# Altium PCB ProstheticController.PcbDoc
Units mil, origin at the board's own origin, x right, y up, seen from the top; angles counter-clockwise.
Board outline 3000 x 2000 mil, 2 copper layers (Top Layer, Bottom Layer); 32 components, 26 nets, 115 pads, 27 vias.
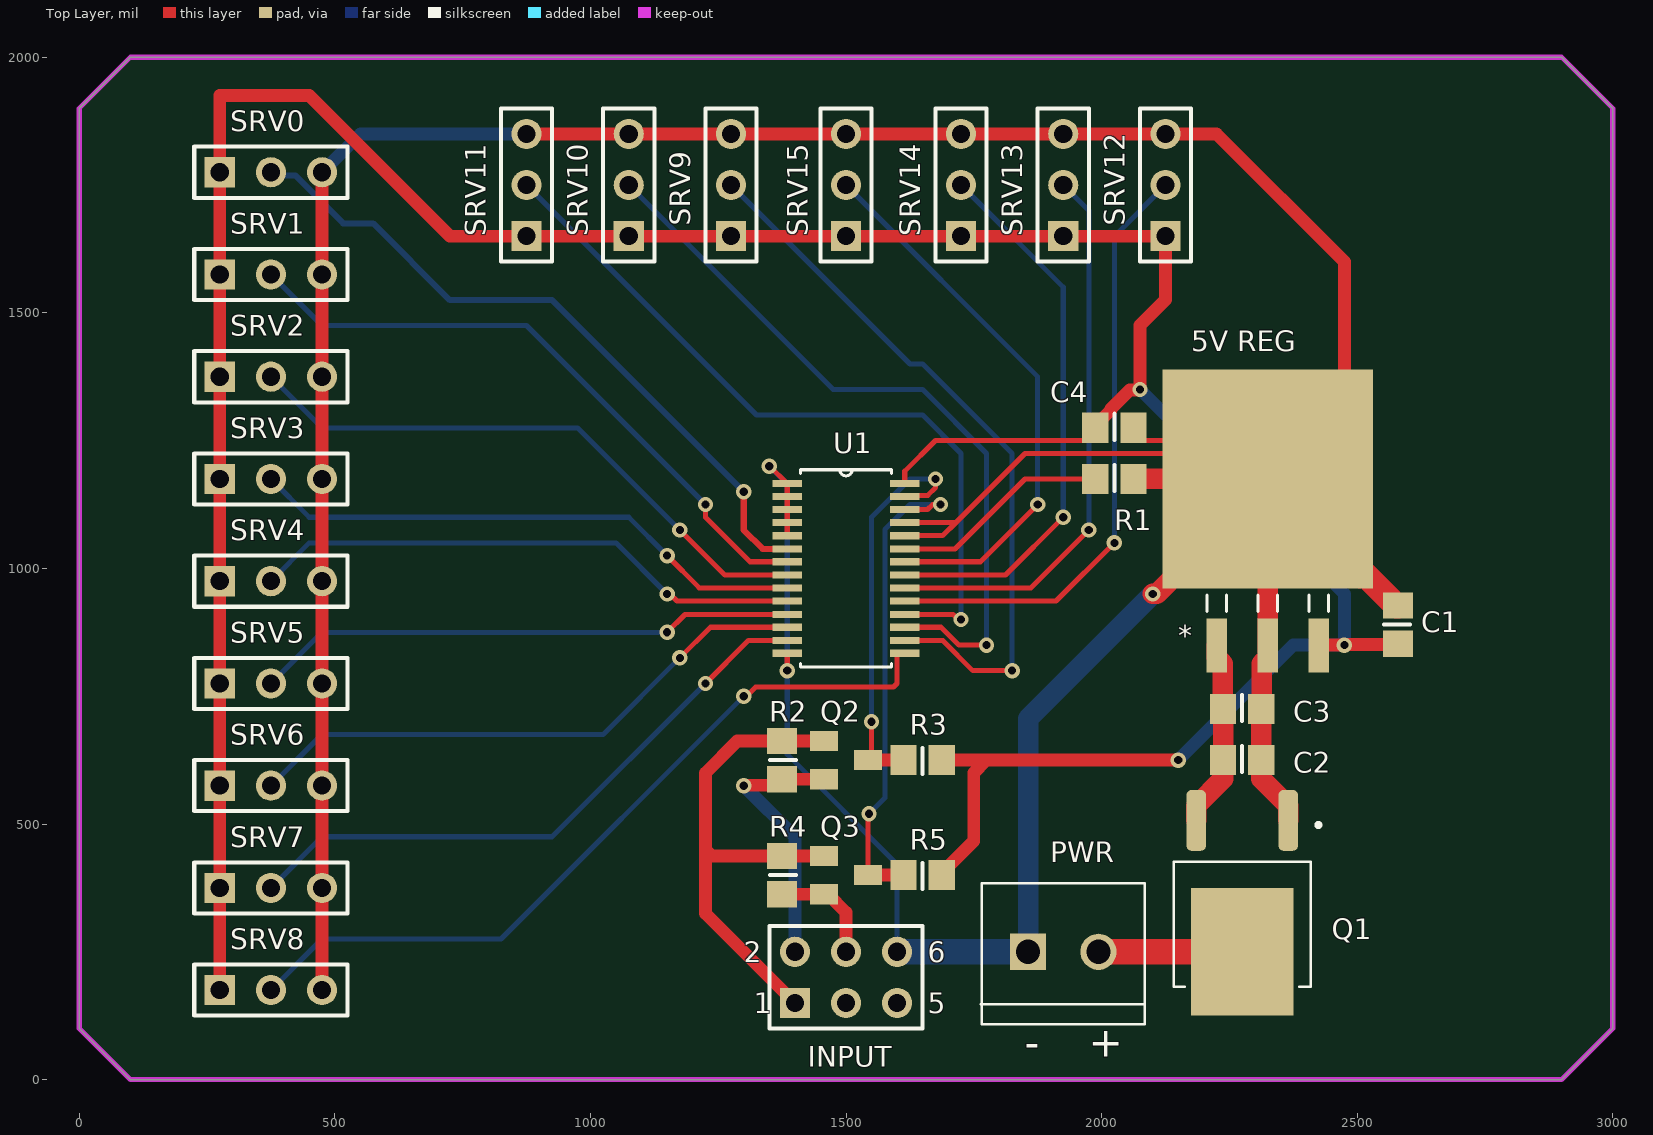
[diagram p0: Top Layer view]
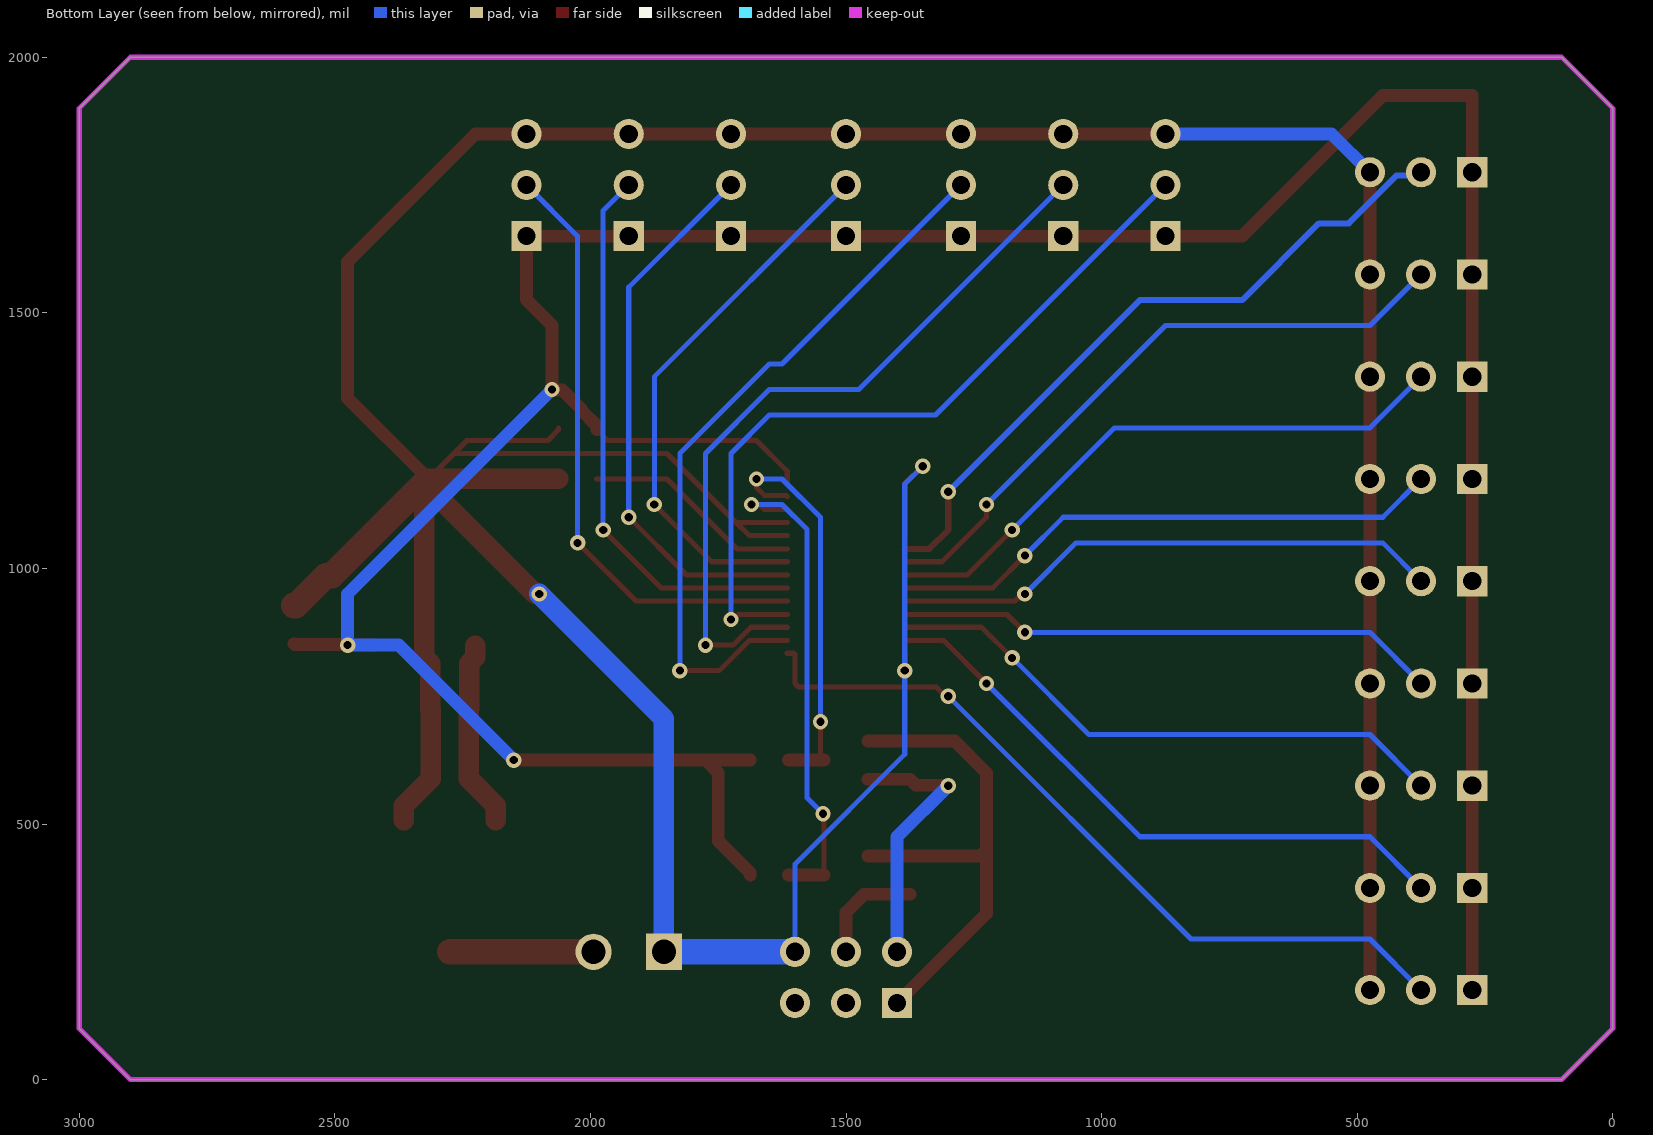
[diagram p1: Bottom Layer view, seen from below]

## Layer stack, top to bottom
Top Solder: solder mask 0.4, Solder Resist, Dk 3.5
Top Layer: signal copper 1.4
Dielectric 1: dielectric 12.6, FR-4, Dk 4.8
Bottom Layer: signal copper 1.4
Bottom Solder: solder mask 0.4, Solder Resist, Dk 3.5

## Board outline
100,0 0,100 0,1900 100,2000 2900,2000 3000,1900 3000,100 2900,0

## Design rules (kind name [scope] priority, off if disabled: settings)
Clearance "Clearance~Sunstone Circuits" [All] p1: gap=6 ignorepadtopadclearanceinfootprint=FALSE except(0: Arc-Hole Track-Hole SMDPad-Hole THPad-Hole Via-Hole Fill-Hole Poly-Hole Region-Hole Text-Hole) // Sunstone Circuits Minimum Clearance Rule (Double Sided)
ComponentClearance [All] p1: gap=0 collisioncheckmode=3 verticalgap=0 showdistances=FALSE
HoleSize "HoleSize~Sunstone Circuits" [All] p1: absolutevalues=TRUE maxlimit=251 minlimit=16 maxpercent=80.000 minpercent=20.000 // SSC Hole Size Rule For Single Sided & Double Sided Designs.
HoleSize Testpoint [All] p2: absolutevalues=TRUE maxlimit=100 minlimit=1 maxpercent=80.000 minpercent=20.000
HoleSize TestPointUsage [All] p3: absolutevalues=TRUE maxlimit=100 minlimit=1 maxpercent=80.000 minpercent=20.000
MinimumAnnularRing "MinimumAnnularRing~Sunstone Circuits" [All] p1: minimumring=7 // Sunstone Circuits Minimum Annular Ring (Double Sided)
MinimumSolderMaskSliver [All] p1: minsoldermaskwidth=2
PlaneClearance "PlaneClearance~Sunstone Circuits" [All] p1: clearance=12 // Sunstone Circuits Power Plane Clearance Rule (Double Sided)
PlaneConnect "PlaneConnect~Sunstone Circuits" [All] p1: planeconnectstyle=Relief reliefexpansion=10 reliefentries=4 reliefconductorwidth=8 reliefairgap=10 // Sunstone Circuits Power Plane Connect Rule (Double Sided)
PolygonConnect "PolygonConnect~Sunstone Circuits" [All] p1: connectstyle=Relief reliefconductorwidth=8 reliefentries=4 polygonreliefangle="90 Angle" airgapwidth=10 // Sunstone Circuits Polygon Connect Style (Double Sided)
RoutingVias "RoutingVias~Sunstone Circuits" [All] p1: holewidth=16 width=30 viastyle="Through Hole" minholewidth=16 minwidth=30 maxholewidth=20 maxwidth=40 // Sunstone Circuits Routing Vias Rule (Double Sided)
ShortCircuit "ShortCircuit~Sunstone Circuits" [All] p1: allowed=FALSE // Sunstone Circuits Short Circuit Rule~Do Not Allow (Double Sided)
SilkToSilkClearance [All] p1: silktosilkclearance=1
SilkToSolderMaskClearance [IsPad] p1: minsilkscreentomaskgap=3 clearancetoexposedcopper=TRUE
SolderMaskExpansion "SolderMaskExpansion~Sunstone Circuits" [All] p1: expansion=3 // Sunstone Circuits Solder Mask Expansion Rule (Double Sided)
ViasUnderSMD "ViasUnderSMD~Sunstone Circuits" [All] p1: allowed=FALSE // Sunstone Circuits Vias Under SMD~Do Not Allow (Double Sided)
Width "Width~Sunstone Circuits" [All] p1: maxlimit=100 minlimit=6 preferedwidth=10 // Sunstone Circuits Minimum Width Rule (Double Sided)
22 further rules are at their usual default settings.

## Components (designator, comment, footprint, x,y, rotation, side; value= is the part's Value field where it differs from the comment)
"5V REG" "LM340SX-5.0/NOPB" TS3B_TEX 2325,1175 r0 top
C1 "10uF" 0805-CAP 2580,890 r270 top
C2 "10uF" 0805-CAP 2275,625 r180 top
C3 "220nF" 0805-CAP 2275,725 r180 top
C4 "100nF" 0805-CAP 2025,1275 r180 top
INPUT "Header 3X2" HDR2X3 1400,150 r0 top
PWR "PWR" OST_OSTTE020161 1925,250 r0 top
Q1 "AOD417" DPAK228P994X240_3N 2275,346.06 r180 top
Q2 "BSS138" *BSS138_BSS138(Primary) 1500,625 r270 top
Q3 "BSS138" *BSS138_BSS138(Primary) 1500,400 r270 top
R1 "10k" 0805-RES 2025,1175 r180 top
R2 "2.4k" 0805-RES 1375,625 r90 top
R3 "2.4k" 0805-RES 1650,625 r0 top
R4 "2.4k" 0805-RES 1375,400 r90 top
R5 "2.4k" 0805-RES 1650,400 r0 top
SRV0 "Header 3" HDR1X3 275,1775 r0 top
SRV1 "Header 3" HDR1X3 275,1575 r0 top
SRV2 "Header 3" HDR1X3 275,1375 r0 top
SRV3 "Header 3" HDR1X3 275,1175 r0 top
SRV4 "Header 3" HDR1X3 275,975 r0 top
SRV5 "Header 3" HDR1X3 275,775 r0 top
SRV6 "Header 3" HDR1X3 275,575 r0 top
SRV7 "Header 3" HDR1X3 275,375 r0 top
SRV8 "Header 3" HDR1X3 275,175 r0 top
SRV9 "Header 3" HDR1X3 1275,1650 r90 top
SRV10 "Header 3" HDR1X3 1075,1650 r90 top
SRV11 "Header 3" HDR1X3 875,1650 r90 top
SRV12 "Header 3" HDR1X3 2125,1650 r90 top
SRV13 "Header 3" HDR1X3 1925,1650 r90 top
SRV14 "Header 3" HDR1X3 1725,1650 r90 top
SRV15 "Header 3" HDR1X3 1500,1650 r90 top
U1 "PCA9685PW,118" SOP65P640X110-28N 1500,1000 r0 top

## Footprints (in the part's own frame and the unit in brackets; to place one, negate y for a bottom-side part, rotate by r counter-clockwise, add the part's x,y. Pads: shape width x height; smd on the part's side, far side on the other; paste and mask are expansions set on the pad)
0805-CAP [mm]
  rect 1.3x1.5 smd: 1(-0.95,0) 2(0.95,0)
  silkscreen extent 0,-0.7 0,0.6, body extent -1,-0.68 1,0.57, height 0.78
0805-RES [mm]
  rect 1.3x1.5 smd: 1(-0.95,0) 2(0.95,0)
  silkscreen extent 0,-0.7 0,0.6, body extent -1,-0.68 1,0.57, height 0.78
*BSS138_BSS138(Primary) [mm]
  rect 1x1.4 smd: D(0,1.1) G(-0.95,-1.1) S(0.95,-1.1)
DPAK228P994X240_3N [mm]
  rrect50% 0.97x3.02 smd: 1(-2.286,-4.09) 3(2.286,-4.09)
  rect 5.09x6.32 smd paste-4: 4(0,2.44)
  silkscreen extent -3.89,-3.96 3.4,4.18
HDR1X3 [mm] "Connector; Header; 3 Position"
  rect 1.5x1.5 hole 0.9: 1(0,0)
  round 1.5 hole 0.9: 2(2.54,0) 3(5.08,0)
  silkscreen extent -1.27,-1.27 6.35,1.27
HDR2X3 [mm] "Connector; Header; 3x2 Position"
  rect 1.5x1.5 hole 0.9: 1(0,0)
  round 1.5 hole 0.9: 2(0,2.54) 3(2.54,0) 4(2.54,2.54) 5(5.08,0) 6(5.08,2.54)
  silkscreen extent -1.27,-1.27 6.35,3.81
OST_OSTTE020161 [mm]
  rect 1.8x1.8 hole 1.2: 1(-1.75,0)
  round 1.8 hole 1.2: 2(1.75,0)
  silkscreen extent -4.1,-3.6 4.05,3.4
SOP65P640X110-28N [mil]
  rect 58x14 smd: 1(-115,166) 2(-115,141) 3(-115,115) 4(-115,90) 5(-115,64) 6(-115,38) 7(-115,13) 8(-115,-13) 9(-115,-38) 10(-115,-64) 11(-115,-90) 12(-115,-115) 13(-115,-141) 14(-115,-166) 15(115,-166) 16(115,-141) 17(115,-115) 18(115,-90) 19(115,-64) 20(115,-38) 21(115,-13) 22(115,13) 23(115,38) 24(115,64) 25(115,90) 26(115,115) 27(115,141) 28(115,166)
  silkscreen extent -89,-193 89,193
TS3B_TEX [mil]
  rect 40x106 smd: 1(-100,-326) 2(0,-326) 3(100,-326)
  rect 412x428 smd: 4(0,0)
  Mechanical 16 keep-out region: -4100,-875
  silkscreen extent -119,-259 119,-227

## Part data
C1 C2 C3 C4: library part Cap, "Capacitor"
INPUT: "Header, 3-Pin, Dual row", LatestRevisionDate=17-Jul-2002, LatestRevisionNote="Re-released for DXP Platform.", Publisher="Altium Limited"
PWR: library part OSTTE020161, "Fio de 2 posições para embarcar na horizontal do bloco de terminais com furo passante da placa 0,138 _3,50 mm_", Package=None, Availability=Unavailable, MF="On Shore", MP=OSTTE020161, Price=None, SnapEDA_Link=https://www.snapeda.com/parts/OSTTE020161/On%20Shore%20Technology%20Inc./view-part/249314/?ref=snap
Q1: "P-Channel 30V 25A _Ta_ 2.5W _Ta_, 50W _Tc_ Surface Mount TO-252, _D-Pak_", Package="TO-252 Alpha &amp; Omega Semiconductor", Availability=Unavailable, MF="Alpha &", MP=AOD417, Price=None, SnapEDA_Link=https://www.snapeda.com/parts/AOD417/Alpha%20%26%20Omega%20Semiconductor%20Inc./view-part/454934/?ref=snap
Q2 Q3: "N-Channel 50V 220mA _Ta_ 360mW _Ta_ Surface Mount Die", Package="SOT-23 Fairchild Semiconductor", Availability=Unavailable, MF="MICROSS/On Semiconductor", MP=BSS138, Price=None, SnapEDA_Link=https://www.snapeda.com/parts/BSS138/MICROSS/On%20Semiconductor/view-part/215/?ref=snap
R1 R2 R3 R4 R5: library part ResBasic, "Resistor"
SRV0 SRV1 SRV2 SRV3 SRV4 SRV5 SRV6 SRV7 SRV8 SRV9 SRV10 SRV11 SRV12 SRV13 SRV14 SRV15: "Header, 3-Pin", LatestRevisionDate=17-Jul-2002, LatestRevisionNote="Re-released for DXP Platform.", Publisher="Altium Limited"
U1: "LED Driver IC 16 Output Linear PWM Dimming 25mA 28-TSSOP", Package="TSSOP-28 NXP Semiconductors", Digi-Key_Part_Number=568-11925-1-ND, Digi-Key_Purchase_URL=https://www.digikey.in/product-detail/en/nxp-usa-inc/PCA9685PW,118/568-11925-1-ND/5221902?utm_source=snapeda&utm_medium=aggregator&utm_campaign=symbol, MF="NXP USA", MP=PCA9685PW,118, SnapEDA_Link=https://www.snapeda.com/parts/PCA9685PW%2C118/NXP%20USA%20Inc./view-part/1041520/?ref=snap
"5V REG": Built_By=EMA_UL_Team, C="Copyright (C) 2015 Accelerated Designs. All rights reserved", Manufacturer_Part_Number=LM340SX-5.0/NOPB, SourceLibrary=National_2014-06-20, Vendor="Texas Instruments"

## Via types
v1: diameter 30, hole 16, Top Layer to Bottom Layer, 27 vias

## Nets (pads, with @x,y where several pads share a name; then routed paths per layer and width w, separated by ;. In a path a pad name is that pad's centre, name@x,y a point inside that pad or via, vN(x,y) a via of type N, cw(c..) or ccw(c..) an arc to the next point about the centre after c; other vN are vias at no path point)
5V: "5V REG.3" C1.2 C4.2 R3.2 R5.2 SRV0.1 SRV1.1 SRV2.1 SRV3.1 SRV4.1 SRV5.1 SRV6.1 SRV7.1 SRV8.1 SRV9.1 SRV10.1 SRV11.1 SRV12.1 SRV13.1 SRV14.1 SRV15.1 U1.28 | length 6555.3
  Top Layer w10: U1.28 1615,1190 1675,1250 1962.6,1250 1963.07,1250.47 1967.01,1250.47 C4.2@1987.6,1271.06
  Top Layer w25: SRV8.1 SRV7.1 SRV6.1 SRV5.1 SRV4.1 SRV3.1 SRV2.1 SRV1.1 SRV0.1 275,1925 450,1925 725,1650 SRV11.1 SRV10.1 SRV9.1 SRV15.1 SRV14.1 SRV13.1 SRV12.1 2125,1525.68 2075,1475.68 v1(2075,1350) 2074.04,1349.04 2055.16,1349.04 2018.31,1312.19 2018.31,1309.65 1987.6,1278.94 C4.2 C4.2@1987.6,1271.06 ; R5.2 1687.4,403.94 1750,466.54 1750,600 1775,625 ; R3.2 1775,625 ; v1(2150,625) 1775,625 ; 2425,849 2426,850 v1(2475,850) 2475.96,850.96 2578.36,850.96 C1.2
  Bottom Layer w25: v1(2075,1350) 2475,950 v1(2475,850) 2375,850 v1(2150,625)
GND: "5V REG.2" "5V REG.4" C1.1 C2.1 C3.1 C4.1 INPUT.6 PWR.1 Q1.1 R1.1 SRV0.3 SRV1.3 SRV2.3 SRV3.3 SRV4.3 SRV5.3 SRV6.3 SRV7.3 SRV8.3 SRV9.3 SRV10.3 SRV11.3 SRV12.3 SRV13.3 SRV14.3 SRV15.3 U1.1 U1.2 U1.3 U1.4 U1.5 U1.14 U1.24 U1.25 | length 9259.8
  Top Layer w10: v1(1350,1200) 1351,1200 U1.1 U1.2 U1.3 U1.4 U1.5 ; v1(1385,800) U1.14 ; U1.24 1689,1064 1715,1090 ; U1.25 1715,1090 ; C4.1 2062.4,1271.06 2082.99,1250.47 2241.53,1250.47 2267,1225 ; 2317,1175 2267,1225 ; 1715,1090 1850,1225 2267,1225
  Top Layer w25: SRV8.3 SRV7.3 SRV6.3 SRV5.3 SRV4.3 SRV3.3 SRV2.3 SRV1.3 SRV0.3 ; SRV11.3 SRV10.3 SRV9.3 SRV15.3 SRV14.3 SRV13.3 SRV12.3 2225,1850 2475,1600 2475,1333 2317,1175
  Top Layer w40: R1.1 2317,1175 2325,1167 ; v1(2100,950) 2108,950 2325,1167 ; Q1.1 2365,535.63 2312.4,588.23 C2.1 C3.1 2312.99,725.59 2312.99,813.99 2325,826 2325,849 2325,1167
  Top Layer w50: 2325,1167 2506,986 2517.46,986 2576.06,927.4 C1.1
  Bottom Layer w10: v1(1350,1200) 1385,1165 v1(1385,800) 1385,636.43 1600,421.43 INPUT.6
  Bottom Layer w25: SRV0.3 550,1850 SRV11.3
  Bottom Layer w40: PWR.1 1856.1,706.1 v1(2100,950)
  Bottom Layer w50: INPUT.6 PWR.1
NetPWR_2: PWR.2 Q1.4 | length 281.1
  Top Layer w50: PWR.2 Q1.4
NetR1_2: R1.2 U1.23 | length 429.3
  Top Layer w10: U1.23 1713,1038 1850,1175 R1.2
PWM0: SRV0.2 U1.6 | length 1359.2
  Top Layer w12: v1(1300,1150) 1300,1075 1337,1038 U1.6
  Bottom Layer w12: SRV0.2 381.26,1768.74 422.53,1768.74 516.27,1675 575,1675 725,1525 925,1525 v1(1300,1150)
PWM1: SRV1.2 U1.7 | length 1257.4
  Top Layer w10: v1(1225,1125) 1225,1100 1312,1013 U1.7
  Bottom Layer w10: SRV1.2 475,1475 875,1475 v1(1225,1125)
PWM2: SRV2.2 U1.8 | length 1170.7
  Top Layer w10: v1(1175,1075) 1263,987 U1.8
  Bottom Layer w10: SRV2.2 475,1275 975,1275 v1(1175,1075)
PWM3: SRV3.2 U1.9 | length 1098.2
  Top Layer w10: v1(1150,1025) 1213,962 U1.9
  Bottom Layer w10: SRV3.2 450,1100 1075,1100 v1(1150,1025)
PWM4: SRV4.2 U1.10 | length 1088.3
  Top Layer w10: v1(1150,950) 1155.41,950 1169.41,936 U1.10
  Bottom Layer w10: SRV4.2 450,1050 1050,1050 v1(1150,950)
PWM5: SRV5.2 U1.11 | length 1065.9
  Top Layer w10: v1(1150,875) 1185,910 U1.11
  Bottom Layer w10: SRV5.2 475,875 v1(1150,875)
PWM6: SRV6.2 U1.12 | length 1138.4
  Top Layer w10: v1(1175,825) 1235,885 U1.12
  Bottom Layer w10: SRV6.2 475,675 1025,675 v1(1175,825)
PWM7: SRV7.2 U1.13 | length 1210.5
  Top Layer w10: v1(1225,775) 1309,859 U1.13
  Bottom Layer w10: SRV7.2 475,475 925,475 v1(1225,775)
PWM8: SRV8.2 U1.15 | length 1546.4
  Top Layer w10: v1(1300,750) 1305.41,750 1323.38,767.97 1592.97,767.97 1600,775 1600,832 1602,834 U1.15
  Bottom Layer w10: SRV8.2 475,275 825,275 v1(1300,750)
PWM9: SRV9.2 U1.16 | length 1426.9
  Top Layer w10: U1.16 1689.17,859 1748.17,800 v1(1825,800)
  Bottom Layer w10: SRV9.2 1625,1400 1650,1400 1825,1225 v1(1825,800)
PWM10: SRV10.2 U1.17 | length 1467
  Top Layer w10: U1.17 1685.79,885 1720.79,850 v1(1775,850)
  Bottom Layer w10: SRV10.2 1475,1350 1650,1350 1775,1225 v1(1775,850)
PWM11: SRV11.2 U1.18 | length 1506.6
  Top Layer w10: U1.18 1709.59,910 1719.59,900 v1(1725,900)
  Bottom Layer w10: SRV11.2 1325,1300 1650,1300 1725,1225 v1(1725,900)
PWM12: SRV12.2 U1.19 | length 1198.6
  Top Layer w10: U1.19 1911,936 v1(2025,1050)
  Bottom Layer w10: v1(2025,1050) 2025,1650 SRV12.2
PWM13: SRV13.2 U1.20 | length 1102.5
  Top Layer w10: U1.20 1862,962 v1(1975,1075)
  Bottom Layer w10: SRV13.2 1975,1700 v1(1975,1075)
PWM14: SRV14.2 U1.21 | length 1089.6
  Top Layer w10: U1.21 1812,987 v1(1925,1100)
  Bottom Layer w10: SRV14.2 1925,1550 v1(1925,1100)
PWM15: SRV15.2 U1.22 | length 1086.7
  Top Layer w10: U1.22 1763,1013 v1(1875,1125)
  Bottom Layer w10: SRV15.2 1875,1375 v1(1875,1125)
SCL_in: INPUT.4 Q3.S R4.1 | length 216.8
  Top Layer w25: R4.1 1464.57,362.6 1500,327.17 INPUT.4
SCL_S: Q3.D R5.1 U1.26 | length 961.9
  Top Layer w10: Q3.D 1543.31,518.31 v1(1544.98,519.98) ; U1.26 1659.59,1115 1669.59,1125 v1(1684.79,1125)
  Top Layer w25: Q3.D R5.1
  Bottom Layer w10: v1(1544.98,519.98) 1576,551 1576,1076 1625,1125 v1(1684.79,1125)
SDA_in: INPUT.2 Q2.S R2.1 | length 528.3
  Top Layer w25: v1(1300,575) 1300.96,575.96 1363.36,575.96 R2.1 Q2.S
  Bottom Layer w25: v1(1300,575) 1400,475 INPUT.2
SDA_S: Q2.D R3.1 U1.27 | length 787.2
  Top Layer w10: Q2.D 1550,631.69 v1(1550,700) ; U1.27 1617,1143 1660.07,1143 1675,1157.93 v1(1675,1175)
  Top Layer w25: Q2.D R3.1
  Bottom Layer w10: v1(1550,700) 1550,1100 1625,1175 v1(1675,1175)
Vin: "5V REG.1" C2.2 C3.2 Q1.3 | length 368.9
  Top Layer w40: Q1.3 2185,535.63 2237.6,588.23 C2.2 C3.2 2237.01,725.59 2237.01,813.99 2225,826 2225,849
VREF: INPUT.1 Q2.G Q3.G R2.2 R4.2 | length 1016.9
  Top Layer w25: INPUT.1 1225,325 1225,450 ; Q3.G R4.2 1237.6,437.4 1225,450 ; Q2.G R2.2 1287.4,662.4 1225,600 1225,450
pads on no net: INPUT.3 INPUT.5

## Keep-outs
Keep-Out Layer:
  the board outline again, w10

## Silkscreen, mask and mechanical layers (free items; w line width, h text height)
Top Overlay:
  text "-" at 1850,25 h100
  text "+" at 1975,25 h100

## Text inside footprints (layer, text, board x,y; h text height)
"5V REG": Top Overlay "*" at 2150,849 h40; Mechanical 1 "*" at 2225,985 h40
INPUT: Top Overlay "6" at 1660,230 h40; Top Overlay "5" at 1660,130 h40; Top Overlay "2" at 1300,230 h40; Top Overlay "1" at 1320,130 h40